# EAGLE board 5v_LP_Test_Control (EAGLE 9.2.1)
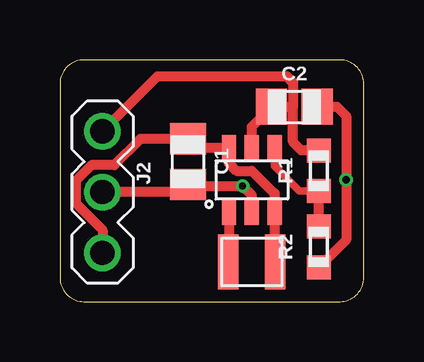
[diagram p0: board, top side]
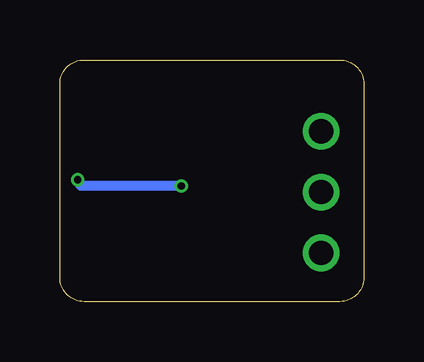
[diagram p1: board, bottom side, seen from below]

Size 12.68 x 10.08 mm. Coordinates in mm from the lower left corner, seen from the top.
Outline: 0,9.08 0,1 arc90 1,0 11.68,0 arc90 12.68,1 12.68,9.08 arc90 11.68,10.08 1,10.08 arc90 0,9.08
Copper layers (1*16): Top 0.035559375mm / dielectric 1.6mm / Bottom 0.035559375mm
Design rules "oshpark-2layer *": minimum track width 8mil, minimum drill 10mil, track to track 8mil, track to pad 8mil, pad to pad 8mil, via to via 6mil, smd to smd 6mil, copper to edge 15mil, drill to drill 6mil, minimum pad ring 5mil, minimum via ring 5mil, stop-mask expansion 2.5mil, vias tented up to drill 0mil, thermal gap 10mil

## Footprints (pad centres in the part's own frame; a part is rotated, then mirrored left to right if it is on the bottom)
C0805 = smd 1.3 x 1.5: 1 -0.95,0; 2 0.95,0
1X03 = drill 1.016: 1 -2.54,0; 2 0,0; 3 2.54,0
1008 = smd 0.85 x 2.3: 1 -0.975,0; 2 0.975,0
R0603 = smd 1 x 1: 1 -0.85,0; 2 0.85,0
DBV_R-PDSO-G6 = smd 0.6 x 1.05: 1 -0.95,-1.35; 2 0,-1.35; 3 0.95,-1.35; 4 0.95,1.35; 5 0,1.35; 6 -0.95,1.35

## Placement (x,y rotation side)
C1  10uF  [C0805]  5.33,5.84 270 top
C2  10uF  [C0805]  9.78,8.13 0 top
J2  CONN_3  [1X03]  1.78,4.57 270 top
L1  6.8uH  [1008]  8,1.65 180 top
R1  1.62M  [R0603]  10.79,5.46 90 top
R2  180K  [R0603]  10.79,2.29 90 top
U1  TLV61220DBV  [DBV_R-PDSO-G6]  8,5.08 0 top

## Library data of the parts
C1 C2 = bschulz_passives; DIGIKEY: 490-6473-6-ND; MF: Murata; MPN: GRM21BR61C106KE15K
J2 L1 = bschulz
R1 R2 = bschulz_passives; MF: Yageo
U1 = bschulz; DIGIKEY: 296-30547-1-ND; MF: TI; MPN: TLV61220DBVR

## Nets
GND: C1.2 C2.2 J2.2 R2.1 U1.2
N$1: R1.1 R2.2 U1.4
N$5: L1.2 U1.1
VIN: C1.1 J2.3 L1.1 U1.3 U1.6
VOUT: C2.1 J2.1 R1.2 U1.5

## Tracks (layer width: path | path; a pad name or v marks a point on that pad's centre or on a via)
GND  (via drill 0.3)
  Top 0.406: U1.2 8,4.45 v7.62,4.83 5.4,4.83 C1.2 5.01,4.57 J2.2 | C2.2 11.56,8.13 11.94,7.75 v11.94,5.08 11.94,2.58 R2.1
  Bottom 0.406: v7.62,4.83 11.81,4.83 v11.94,5.08
N$1
  Top 0.305: R1.1 9.99,4.61 8.95,5.65 U1.4
  Top 0.406: R2.2 R1.1
N$5
  Top 0.406: U1.1 7.05,1.68 L1.2
VIN
  Top 0.406: L1.1 8.95,1.68 U1.3 8.95,4.52 8.01,5.46 7.37,5.46 7.05,5.78 U1.6 5.7,6.43 C1.1 3.36,6.79 2.26,5.69 1.31,5.69 0.66,5.04 0.66,4.11 1.78,2.99 J2.3
VOUT
  Top 0.406: U1.5 8,7.3 C2.1 9.72,8.13 | R1.2 10.07,6.31 9.72,6.66 9.72,8.13 | 9.72,8.13 9.72,9.14 9.47,9.4 4.06,9.4 J2.1